# Altium PCB ayzdrskh-carfan_2024-05-23.pcbdoc
Units mm, origin at the board's own origin, x right, y up, seen from the top; angles counter-clockwise.
Board outline 55.63 x 50.93 mm, 2 copper layers (Top Layer, Bottom Layer); 30 components, 26 nets, 93 pads, 22 vias.
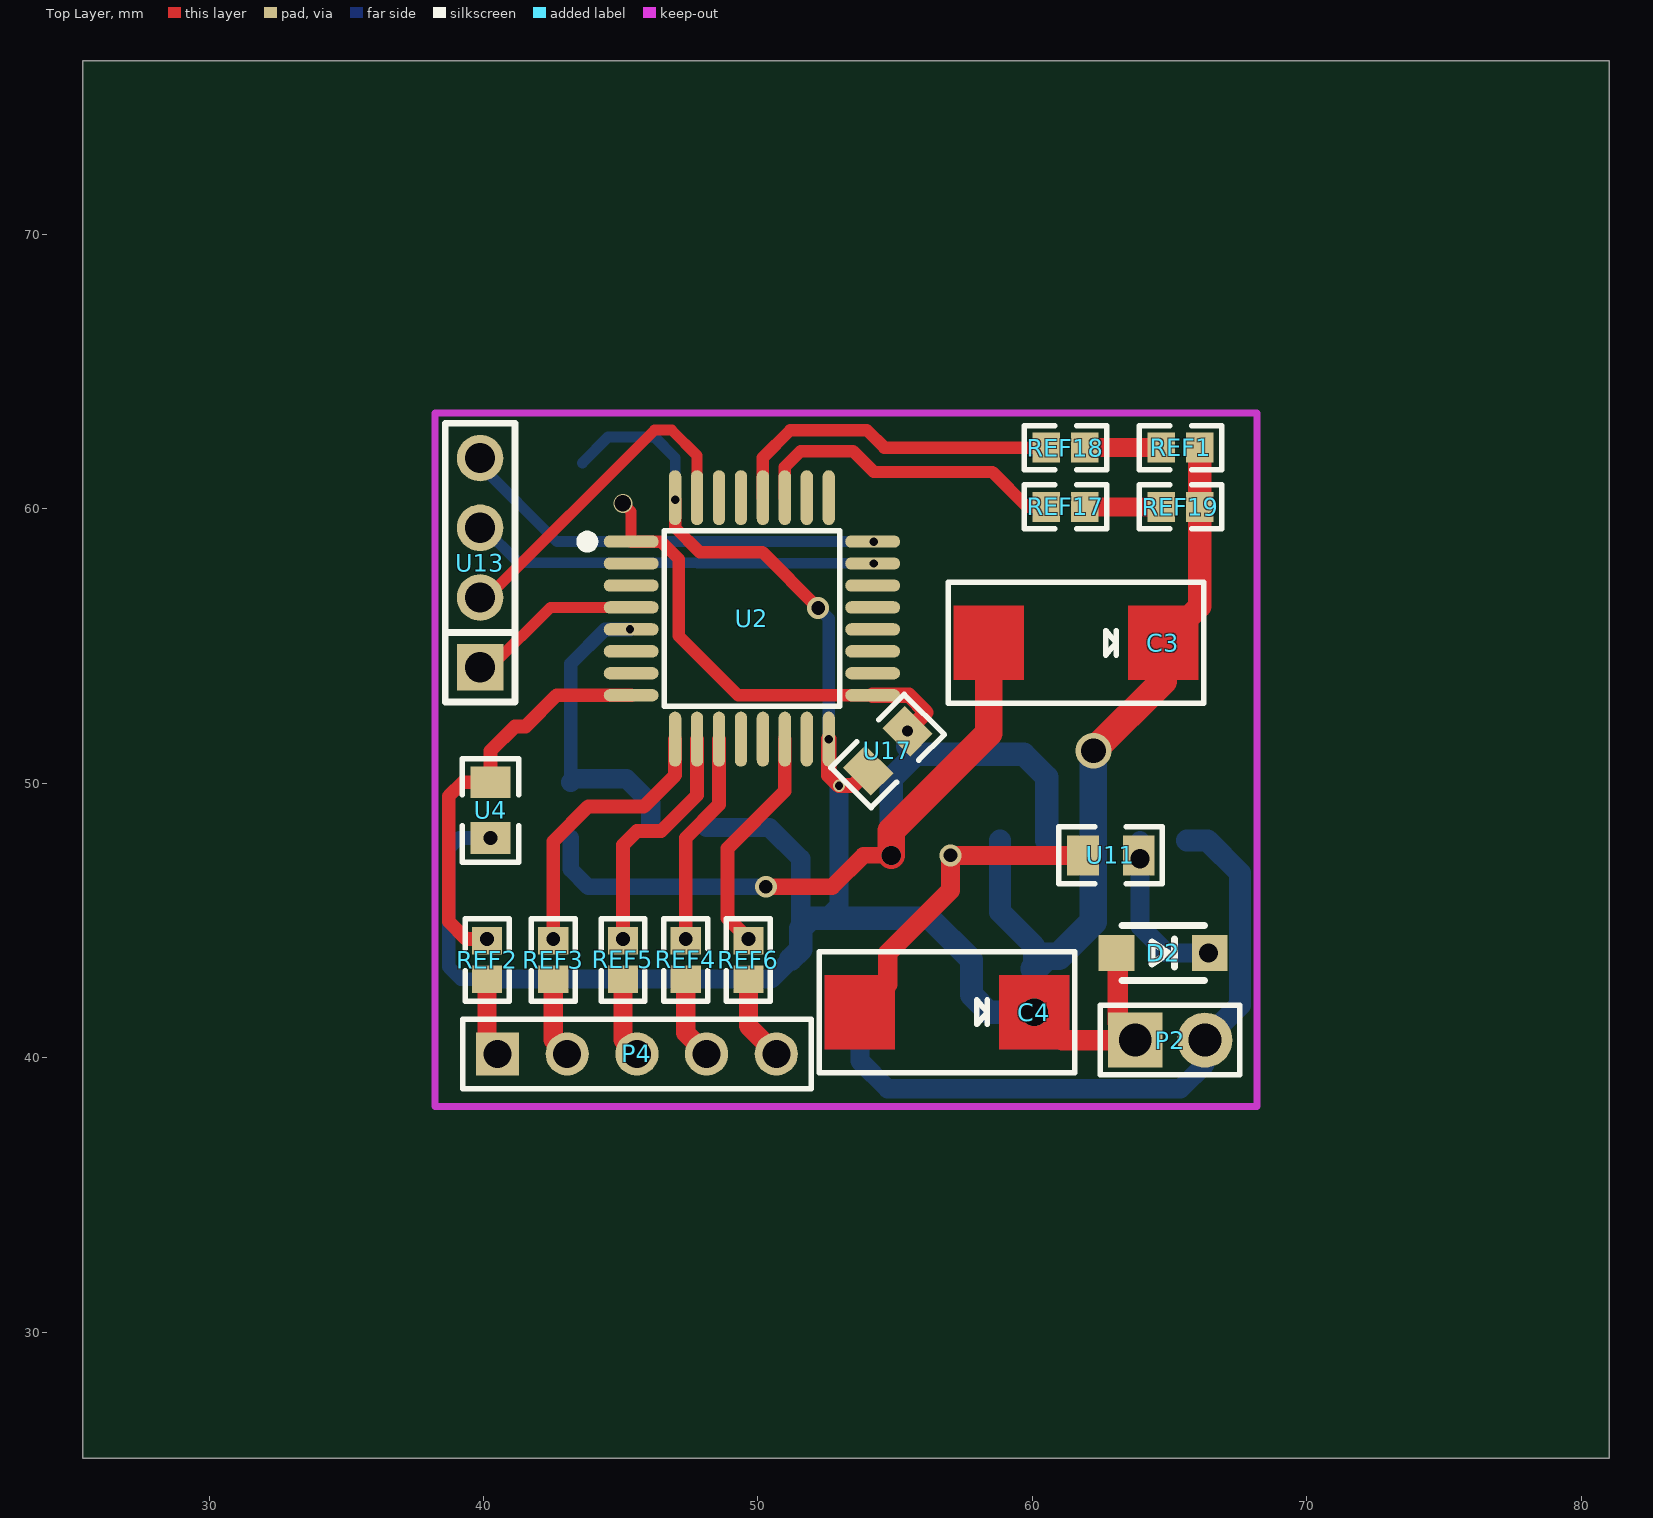
[diagram p0: Top Layer view]
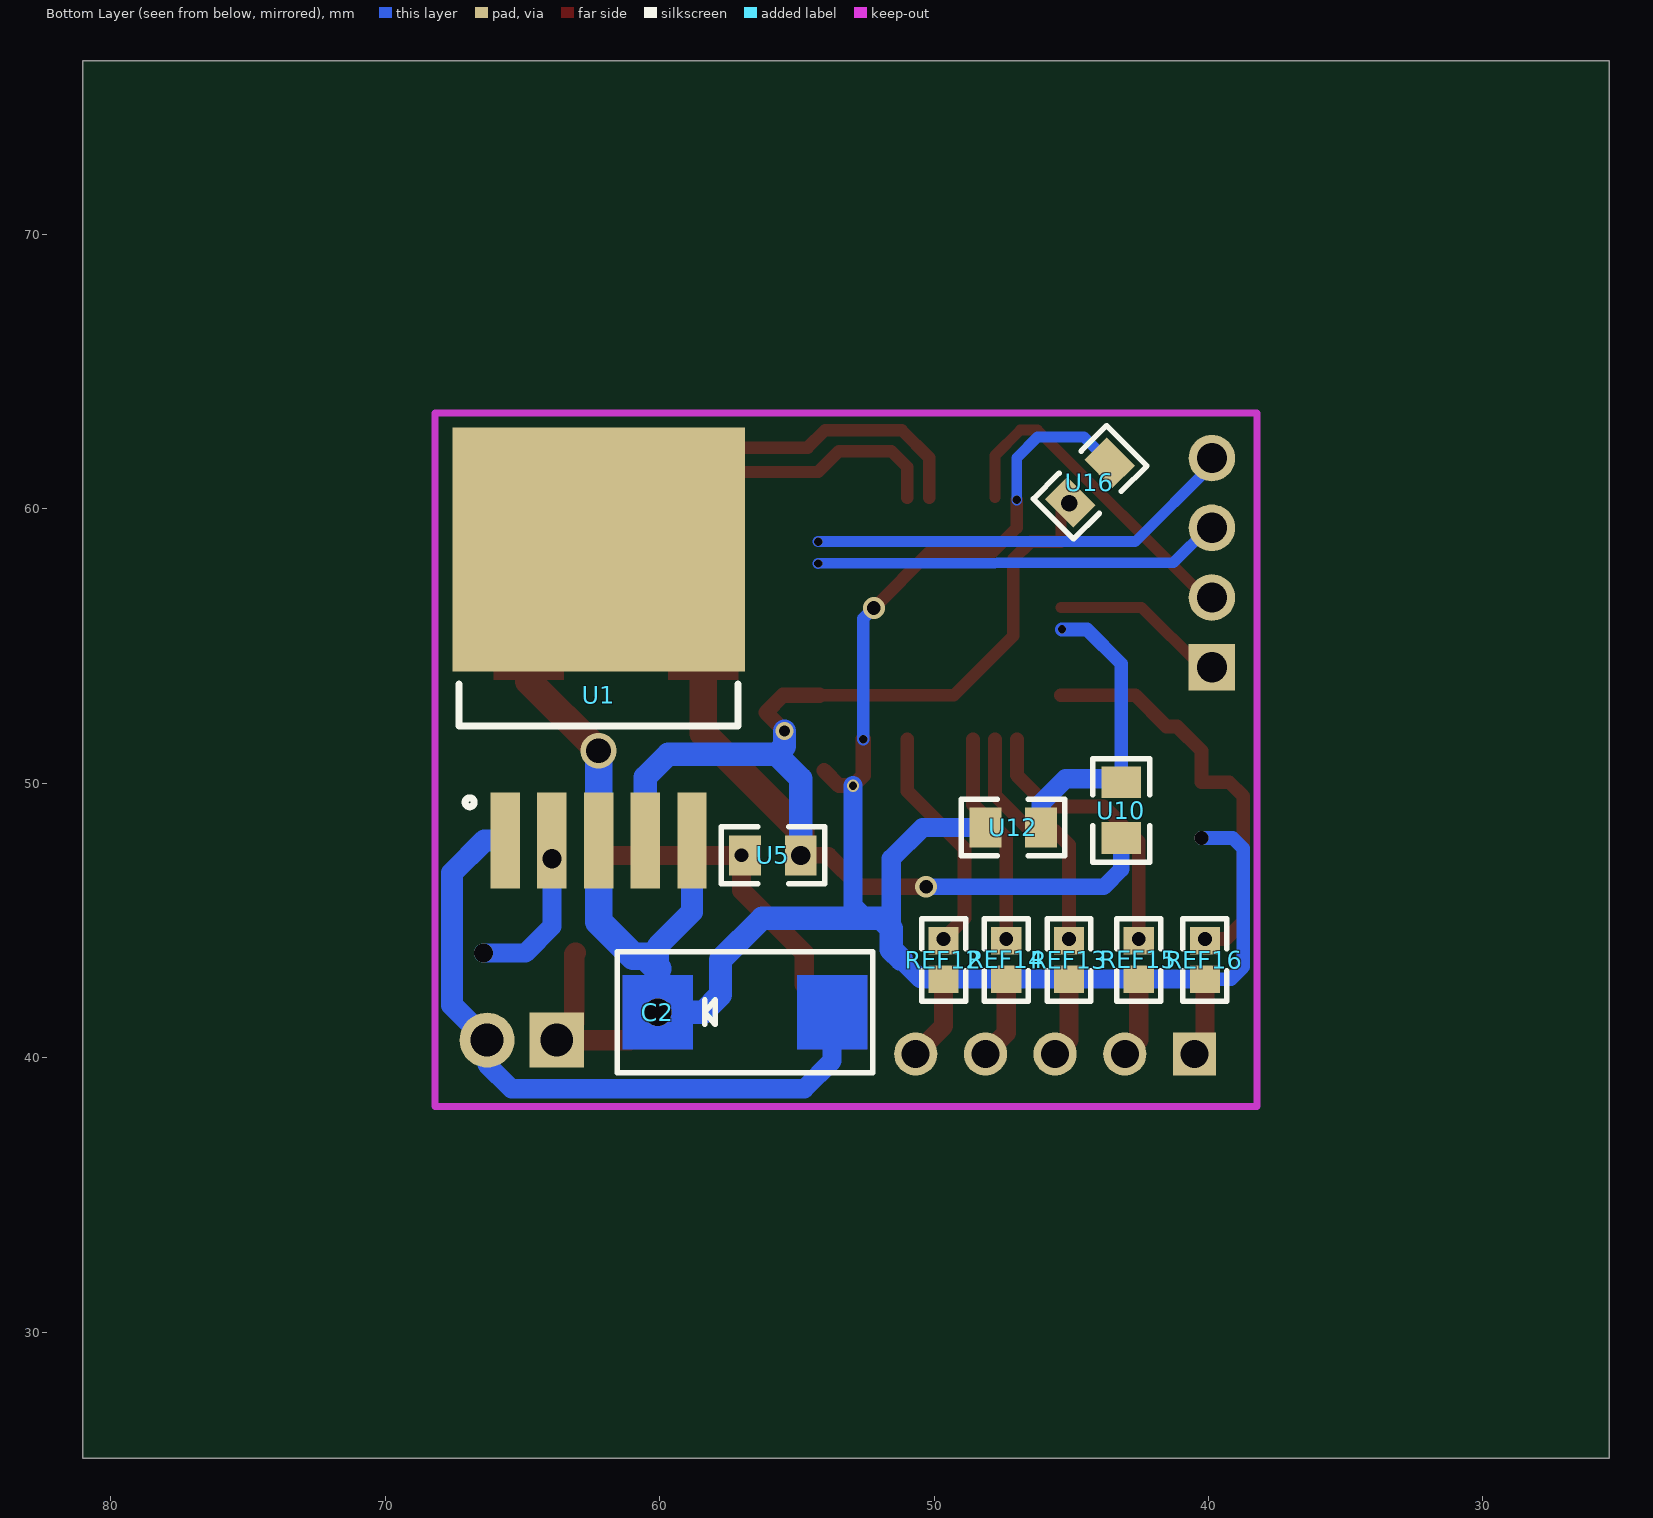
[diagram p1: Bottom Layer view, seen from below]

## Layer stack, top to bottom
Top Layer: signal copper (thickness not stored)
Dielectric: dielectric 0.32, FR-4, Dk 4.8
Bottom Layer: signal copper (thickness not stored)

## Board outline
81.026,25.4 25.4,25.4 25.4,76.327 81.026,76.327

## Components (designator, comment, footprint, x,y, rotation, side; value= is the part's Value field where it differs from the comment)
C2 "EIA7343-31/D-R" EIA7343-31/D-R#1 60.071,41.656 r180 bottom
C3 "EIA7343-31/D-R" EIA7343-31/D-R#2 64.77,55.118 r0 top
C4 "EIA7343-31/D-R" EIA7343-31/D-R#2 60.071,41.656 r0 top
D2 "DIODE_SOD-123FL" DIODE_SOD-123FL 64.77,43.815 r180 top
P2 "HDR-TH_2P-P2.54-V-M" HDR-TH_2P-P2.54-V-M 65.024,40.64 r0 top
P4 "HDR-5X1/2.54" HDR-5X1/2.54 45.593,40.132 r0 top
REF1 "0603" 0603#1 65.405,62.23 r0 top
REF2 "0603" 0603#1 40.132,43.561 r90 top
REF3 "0603" 0603#1 42.545,43.561 r90 top
REF4 "0603" 0603#1 47.371,43.561 r90 top
REF5 "0603" 0603#1 45.085,43.561 r90 top
REF6 "0603" 0603#1 49.657,43.561 r90 top
REF12 "0603" 0603#2 49.657,43.561 r270 bottom
REF13 "0603" 0603#2 45.085,43.561 r270 bottom
REF14 "0603" 0603#2 47.371,43.561 r270 bottom
REF15 "0603" 0603#2 42.545,43.561 r270 bottom
REF16 "0603" 0603#2 40.132,43.561 r270 bottom
REF17 "0603" 0603#1 61.214,60.071 r0 top
REF18 "0603" 0603#1 61.214,62.23 r0 top
REF19 "0603" 0603#1 65.405,60.071 r0 top
U1 "TO-263-5_L10.6-W9.6-P1.70-LS15.9-BR" TO-263-5_L10.6-W9.6-P1.70-LS15.9-BR 62.23,53.213 r90 bottom
U2 "TQFP-32_L7.0-W7.0-P0.50-BL" TQFP-32_L7.0-W7.0-P0.50-BL 49.784,56.007 r270 top
U4 "0805" 0805#1 40.259,49.022 r90 top
U5 "0805" 0805#2 55.88,47.371 r180 bottom
U10 "0805" 0805#2 43.18,49.022 r270 bottom
U11 "0805" 0805#1 62.865,47.371 r0 top
U12 "0805" 0805#2 47.117,48.387 r0 bottom
U13 "DIP-1X4P2.54" DIP-1X4P2.54 39.878,58.039 r90 top
U16 "0805" 0805#2 44.323,60.96 r135 bottom
U17 "0805" 0805#1 54.737,51.181 r45 top

## Footprints (in the part's own frame and the unit in brackets; to place one, negate y for a bottom-side part, rotate by r counter-clockwise, add the part's x,y. Pads: shape width x height; smd on the part's side, far side on the other; paste and mask are expansions set on the pad)
0603#1 [mm]
  rect 1x1.1 smd paste+0 mask+0.102: 1(-0.7,0) 2(0.7,0)
  silkscreen extent -1.5,-0.8 1.5,0.8
0603#2 [mm]
  rect 1x1.1 smd paste+0 mask+0.102: 1(0.7,0) 2(-0.7,0)
  silkscreen extent -1.5,-0.8 1.5,0.8
0805#1 [mm]
  rect 1.16x1.45 smd paste+0 mask+0.102: 1(-1.016,0) 2(1.016,0)
  silkscreen extent -1.9,-1.03 1.87,1.04
0805#2 [mm]
  rect 1.16x1.45 smd paste+0 mask+0.102: 1(1.016,0) 2(-1.016,0)
  silkscreen extent -1.87,-1.04 1.9,1.03
DIODE_SOD-123FL [mm]
  rect 1.3x1.3 smd paste+0 mask+0.102: 1(-1.7,0) 2(1.7,0)
  silkscreen extent -1.5,-1 1.5,1
DIP-1X4P2.54 [mm]
  rect 1.7x1.7 hole 1.1 paste+0 mask+0.102: 1(-3.81,0)
  round 1.7 hole 1.1 paste+0 mask+0.102: 2(-1.27,0) 3(1.27,0) 4(3.81,0)
  silkscreen extent -5.08,-1.27 5.08,1.27
EIA7343-31/D-R#1 [mm]
  Top Layer region: 1.275,-1.35 -1.275,-1.35 -1.275,1.35 1.275,1.35
  Top Layer region: 7.625,-1.35 5.075,-1.35 5.075,1.35 7.625,1.35
  silkscreen extent -1.48,-2.2 7.83,2.2
EIA7343-31/D-R#2 [mm]
  Top Layer region: -1.275,1.35 1.275,1.35 1.275,-1.35 -1.275,-1.35
  Top Layer region: -7.625,1.35 -5.075,1.35 -5.075,-1.35 -7.625,-1.35
  silkscreen extent -7.83,-2.2 1.48,2.2
HDR-5X1/2.54 [mil]
  rect 62x62 hole 40.16 paste+0 mask+4: 1(-200,0)
  round 62 hole 40.16 paste+0 mask+4: 2(-100,0) 3(0,0) 4(100,0) 5(200,0)
  silkscreen extent -250,-50 250,50
HDR-TH_2P-P2.54-V-M [mm]
  rect 2x2 hole 1.2 paste+0 mask+0.102: 1(-1.27,0)
  round 2 hole 1.2 paste+0 mask+0.102: 2(1.27,0)
  silkscreen extent -2.54,-1.27 2.54,1.27
TO-263-5_L10.6-W9.6-P1.70-LS15.9-BR [mm]
  rect 3.5x1.069 smd paste+0 mask+0.102: 1(-5.3,3.404) 2(-5.3,1.702) 3(-5.3,0) 4(-5.3,-1.702) 5(-5.3,-3.404)
  rect 8.89x10.66 smd paste+0 mask+0.102: 6(5.3,0)
  silkscreen extent -4.07,-5.08 0.41,5.08
TQFP-32_L7.0-W7.0-P0.50-BL [mm]
  oval 0.45x2 smd paste+0 mask+0.102: 1(-2.8,-4.4) 2(-2,-4.4) 3(-1.2,-4.4) 4(-0.4,-4.4) 5(0.4,-4.4) 6(1.2,-4.4) 7(2,-4.4) 8(2.8,-4.4) 17(2.8,4.4) 18(2,4.4) 19(1.2,4.4) 20(0.4,4.4) 21(-0.4,4.4) 22(-1.2,4.4) 23(-2,4.4) 24(-2.8,4.4)
  oval 2x0.45 smd paste+0 mask+0.102: 9(4.4,-2.8) 10(4.4,-2) 11(4.4,-1.2) 12(4.4,-0.4) 13(4.4,0.4) 14(4.4,1.2) 15(4.4,2) 16(4.4,2.8) 25(-4.4,2.8) 26(-4.4,2) 27(-4.4,1.2) 28(-4.4,0.4) 29(-4.4,-0.4) 30(-4.4,-1.2) 31(-4.4,-2) 32(-4.4,-2.8)
  silkscreen extent -3.2,-6.2 3.2,3.2

## Via types
v1: diameter 0.5, hole 0.5, Top Layer to Bottom Layer, tented both sides, 6 vias
v2: diameter 0.305, hole 0.305, Top Layer to Bottom Layer, tented both sides, 5 vias
v3: diameter 0.7, hole 0.7, Top Layer to Bottom Layer, tented both sides, 3 vias
v4: diameter 0.8, hole 0.5, Top Layer to Bottom Layer, tented both sides, 3 vias
v5: diameter 0.7, hole 0.6, Top Layer to Bottom Layer, tented both sides, 1 vias
v6: diameter 1, hole 1, Top Layer to Bottom Layer, tented both sides, 1 vias
v7: diameter 1.3, hole 0.9, Top Layer to Bottom Layer, tented both sides, 1 vias
v8: diameter 0.45, hole 0.305, Top Layer to Bottom Layer, tented both sides, 1 vias
v9: diameter 0.65, hole 0.4, Top Layer to Bottom Layer, tented both sides, 1 vias

## Nets (pads, with @x,y where several pads share a name; then routed paths per layer and width w, separated by ;. In a path a pad name is that pad's centre, name@x,y a point inside that pad or via, vN(x,y) a via of type N, cw(c..) or ccw(c..) an arc to the next point about the centre after c; other vN are vias at no path point)
S$67: 
S$69: 
S$7983: REF1.1 REF18.2 | length 2.8
  Top Layer w0.7: REF18.2 REF1.1@64.705,62.23
S$7986: REF17.2 REF19.1 | length 2.8
  Top Layer w0.7: REF17.2 REF19.1
S$7989: REF17.1 U2.27 | length 11.7
  Top Layer w0.45: U2.27 50.983,61.524 51.562,62.103 53.467,62.103 54.229,61.341 58.547,61.341 59.817,60.071 REF17.1
S$7993: REF18.1 U2.28 | length 12.5
  Top Layer w0.45: U2.28@50.183,60.406 50.183,61.867 51.181,62.865 53.975,62.865 54.61,62.23 REF18.1
S$8037: U13.3 U13.4 | length 30.6
  Bottom Layer w0.4: U13.3 40.005,59.309 41.275,58.039 v2(54.229,58.009) ; U13.4 39.878,61.595 42.672,58.801 v2(54.229,58.801)
S$8066: U2.31 U13.2 | length 12.4
  Top Layer w0.4: U13.2 40.132,56.769 46.228,62.865 46.863,62.865 47.785,61.943 U2.31
S$8069: U2.4 U13.1 | length 8.8
  Top Layer w0.4: U13.1 40.259,54.229 42.437,56.407 U2.4 ; 43.035,56.408 U2.4
S$8079: REF12.1 REF16.1 U1.4 U2.1 U2.16 U2.17 U5.1 U12.1 U16.1 U17.1 U17.2 | length 92.3
  Top Layer w0.4: v5(45.085,60.198) 45.384,59.899 U2.1
  Top Layer w0.45: U2.1 46.477,58.806 47.117,58.166 47.117,55.372 49.281,53.208 U2.17 ; v2(46.99,60.325) 46.99,59.309 47.879,58.42 50.165,58.42 v4(52.197,56.388)
  Top Layer w0.55: v2(52.584,51.607) 52.584,50.286 v8(52.959,49.911) 53.467,49.911 U17.1 ; U2.17 55.505,53.207 56.134,52.578 v9(55.455,51.899)
  Bottom Layer w0.4: U16.1 44.537,62.611 46.228,62.611 46.99,61.849 v2(46.99,60.325)
  Bottom Layer w0.45: v4(52.197,56.388) 52.584,56.001 v2(52.584,51.607)
  Bottom Layer w0.5: REF16.1 39.181,42.861 38.735,43.307 38.735,47.625 39.116,48.006 v1(40.259,48.006)
  Bottom Layer w0.7: REF16.1 REF12.1 ; U12.1 50.419,48.387 51.562,47.244 51.562,44.069 ; 52.514,45.085 52.959,45.53 v8(52.959,49.911)
  Bottom Layer w0.85: 51.204,43.584 51.562,43.942 51.562,44.704 51.943,45.085 56.261,45.085 57.785,43.561 57.785,42.291 58.42,41.656 60.071,41.656 ; U5.1 54.864,50.165 55.753,51.054 ; v9(55.455,51.899) 55.455,51.352 55.753,51.054 ; U1.4 60.528,50.216 59.69,51.054 55.753,51.054
S$8100: U10.2 U12.2 | length 11.2
  Bottom Layer w0.5: U10.2 43.18,54.356 44.43,55.606 v2(45.339,55.606)
  Bottom Layer w0.7: U10.2 43.307,50.165 45.212,50.165 46.101,49.276 U12.2
S$8114: P4.1 REF2.1 | length 2.9
  Top Layer w0.7: REF2.1 40.132,40.513 P4.1
S$8117: P4.2 REF3.1 | length 2.9
  Top Layer w0.7: REF3.1 42.545,40.64 P4.2
S$8119: P4.3 REF5.1 | length 2.9
  Top Layer w0.7: REF5.1 45.085,40.64 P4.3
S$8121: P4.4 REF4.1 | length 3
  Top Layer w0.7: REF4.1 47.371,40.894 P4.4
S$8123: P4.5 REF6.1 | length 3.1
  Top Layer w0.7: REF6.1 49.657,41.148 P4.5
S$8179: U2.8 U4.2 | length 15.1
  Top Layer w0.5: v1(40.132,44.323) 39.37,44.323 38.735,44.958 38.735,49.53 39.243,50.038 U4.2 40.259,51.181 41.148,52.07 41.529,52.07 42.667,53.208 U2.8
S$8183: U2.9 | length 10.3
  Top Layer w0.5: v1(42.545,44.323) 42.545,47.879 43.815,49.149 45.847,49.149 46.984,50.286 U2.9
S$8186: U2.10 | length 8.9
  Top Layer w0.5: v1(45.085,44.323) 45.085,47.752 45.593,48.26 46.482,48.26 47.785,49.563 U2.10
S$8189: U2.11 | length 7.8
  Top Layer w0.5: v1(47.371,44.323) 47.371,48.006 48.584,49.219 U2.11
S$8192: U2.14 | length 8.5
  Top Layer w0.5: v1(49.657,44.323) 48.895,45.085 48.895,47.625 50.983,49.713 U2.14
S$8223: P2.2 U1.1 | length 25.1
  Bottom Layer w0.7: 53.721,41.656 53.721,39.878 54.737,38.862 65.405,38.862 66.294,39.751 P2.2
  Bottom Layer w0.8: U1.1 66.388,47.912 67.564,46.736 67.564,41.91 P2.2
S$8231: U1.2 | length 6
  Bottom Layer w0.7: U1.2 v3(63.932,47.244) 63.932,44.78 64.897,43.815 v3(66.421,43.815)
S$8242: U11.1 | length 11.9
  Top Layer w0.7: 53.721,41.656 54.737,42.672 54.737,43.815 57.023,46.101 v4(57.023,47.371) U11.1
S$8297: U10.1 | length 22.8
  Top Layer w0.6: v4(50.292,46.228) 52.705,46.228 53.848,47.371 v3(54.864,47.371)
  Top Layer w1: v3(54.864,47.371) 54.864,48.26 58.42,51.816 58.42,55.118
  Bottom Layer w0.6: U10.1 43.18,46.863 43.815,46.228 v4(50.292,46.228)
S$8457: D2.2 P2.1 REF1.2 REF19.2 U1.3 U1.5 | length 38.2
  Top Layer w0.75: 60.452,41.275 v6(60.071,41.656) 61.087,40.64 P2.1 63.119,41.275 63.119,43.767 D2.2
  Top Layer w0.85: 64.77,55.118 66.105,56.453 REF19.2 REF1.2
  Top Layer w1: v7(62.23,51.181) 64.77,53.721 64.77,55.118
  Bottom Layer w0.8: U1.5 58.826,45.314 60.071,44.069 v6(60.071,41.656) 60.071,43.233
  Bottom Layer w1: 60.071,43.233 60.526,43.688 60.96,43.688 62.23,44.958 U1.3 ; U1.3 v7(62.23,51.181)
pads on no net: D2.1 REF2.2 REF3.2 REF4.2 REF5.2 REF6.2 REF12.2 REF13.1 REF13.2 REF14.1 REF14.2 REF15.1 REF15.2 REF16.2 U1.6 U2.2 U2.3 U2.5 U2.6 U2.7 U2.12 U2.13 U2.15 U2.18 U2.19 U2.20 U2.21 U2.22 U2.23 U2.24 U2.25 U2.26 U2.29 U2.30 U2.32 U4.1 U5.2 U11.2 U16.2
copper on no net: | length 2.4
  Bottom Layer w0.7: 49.657,42.86 50.48,42.86 51.562,43.942